# Altium PCB logi-cam.PcbDoc
Units mil, origin at the board's own origin, x right, y up, seen from the top; angles counter-clockwise.
Board outline 1730 x 1379 mil, 2 copper layers (Top Layer, Bottom Layer); 25 components, 25 nets, 102 pads, 55 vias.
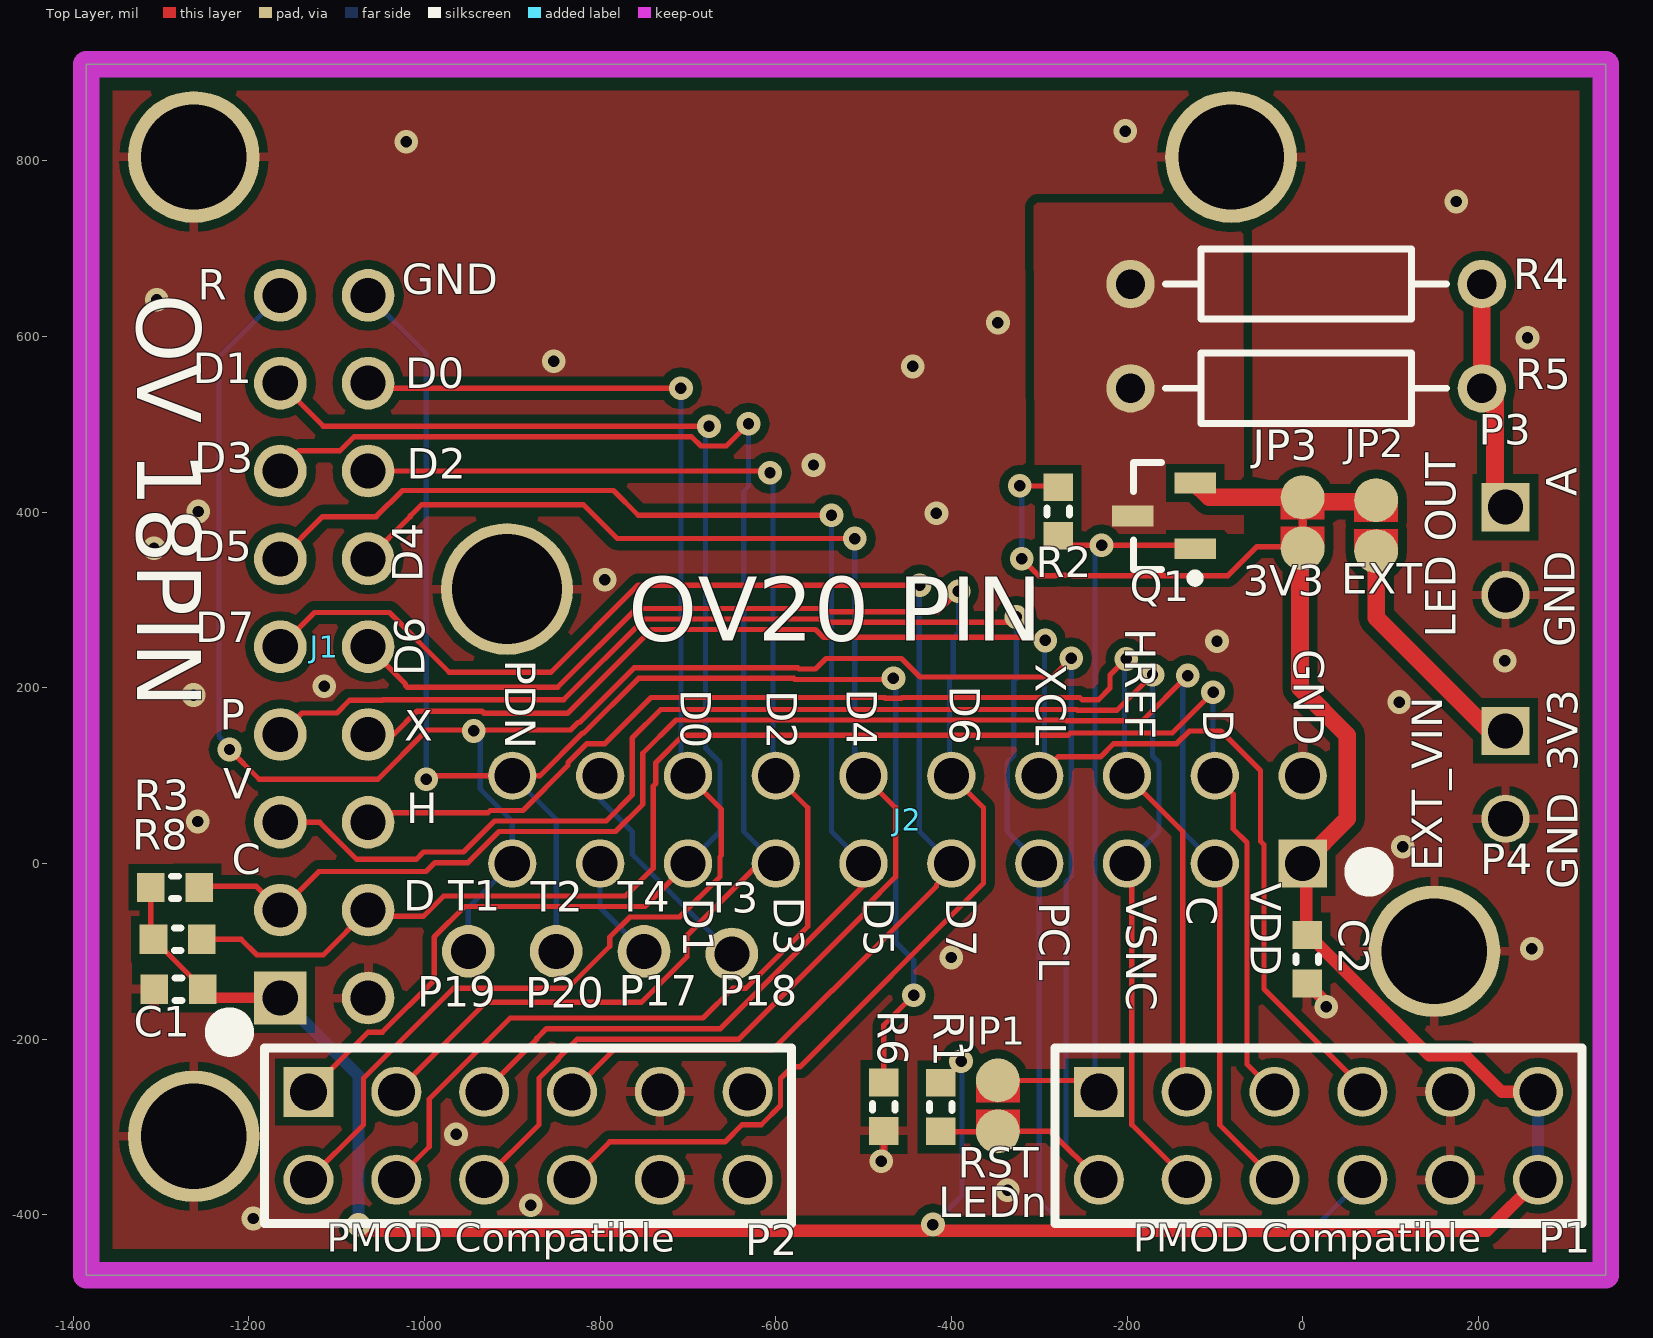
[diagram p0: Top Layer view]
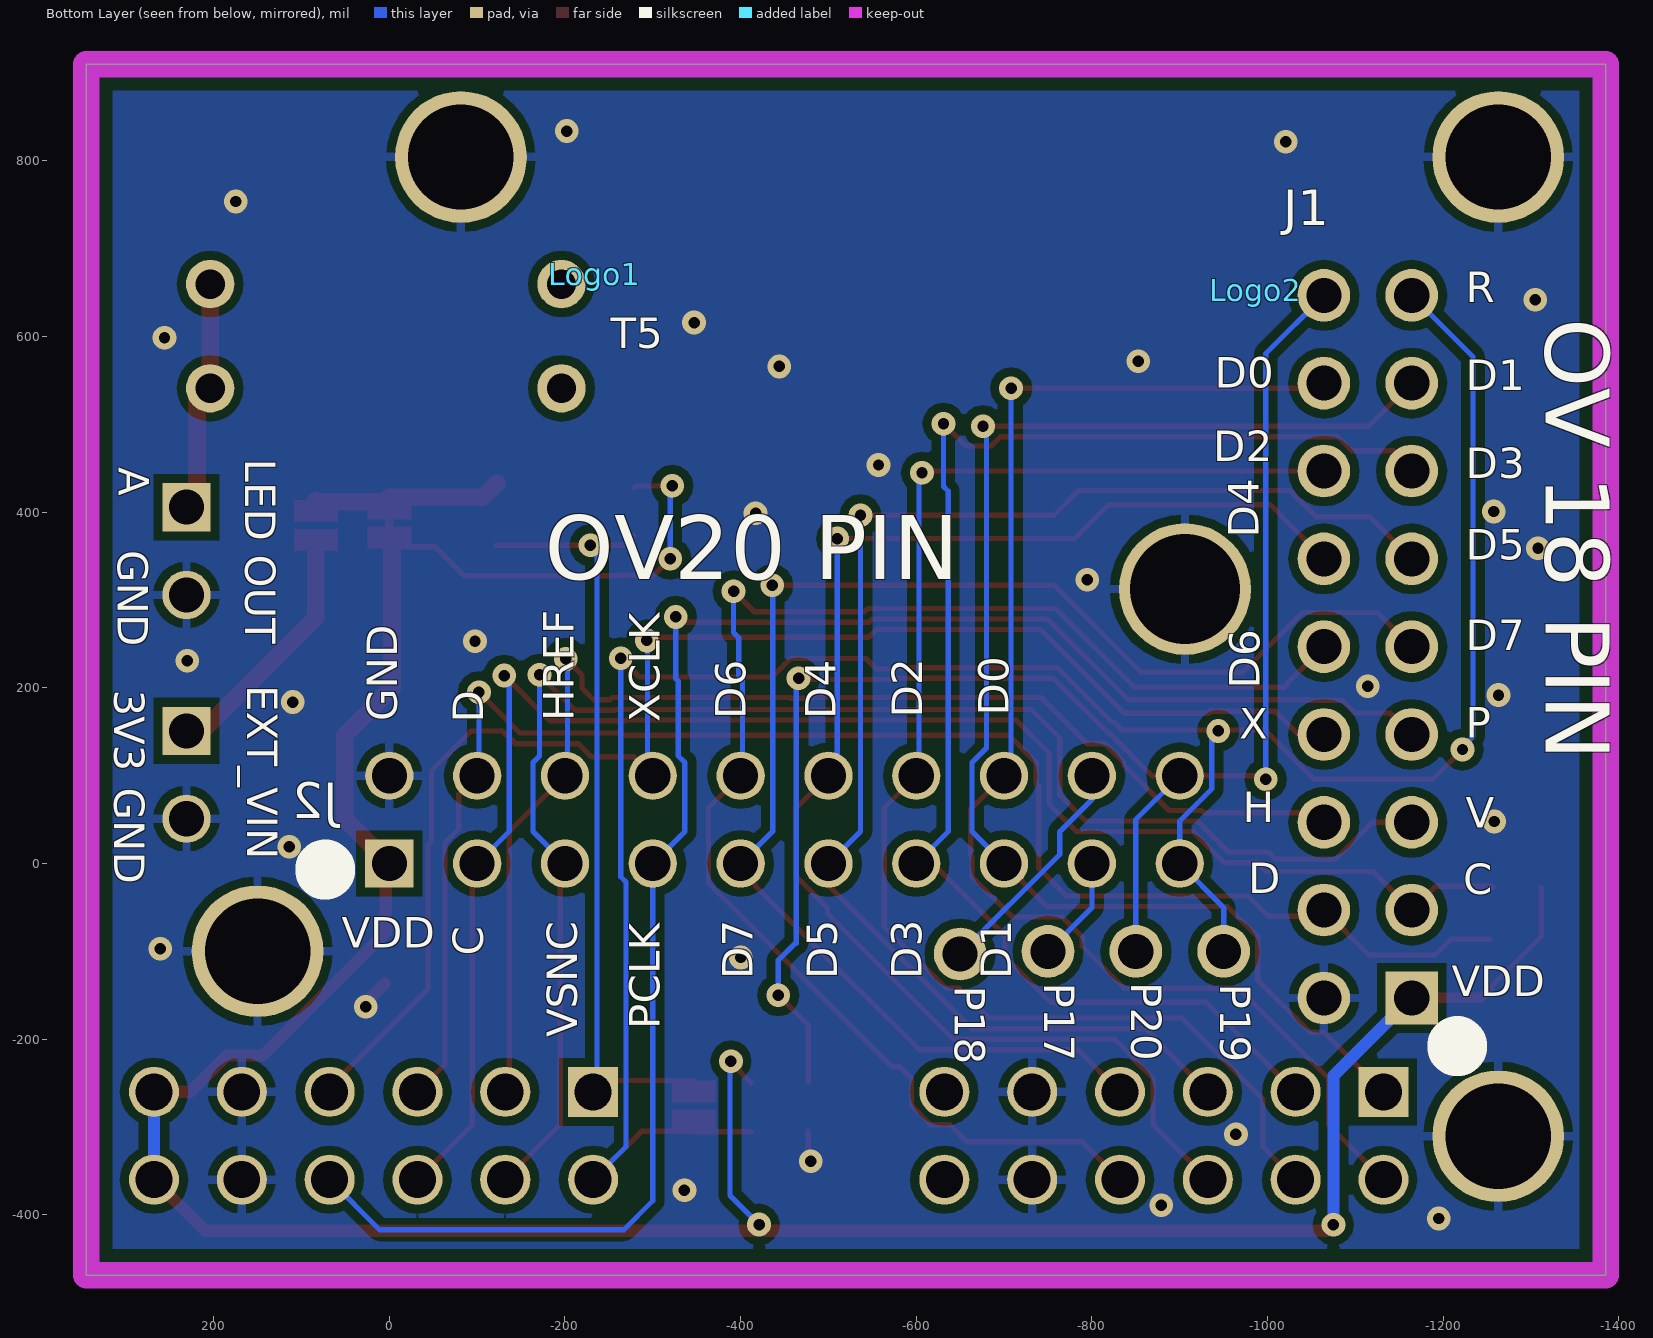
[diagram p1: Bottom Layer view, seen from below]
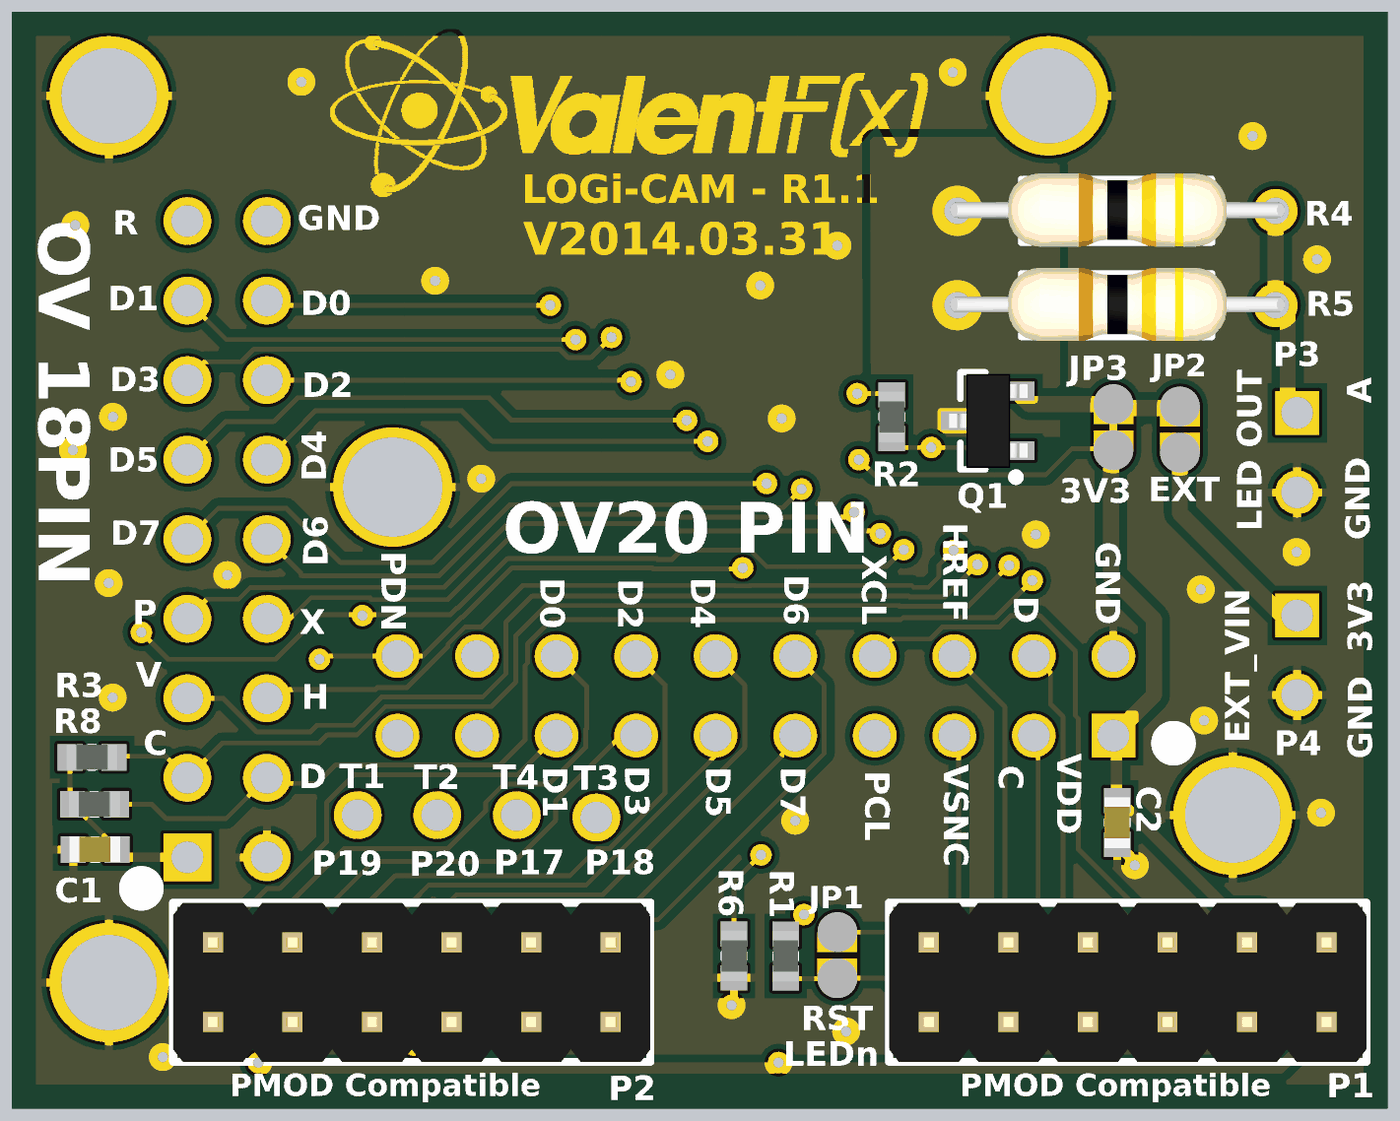
[diagram p2: 3D render of the assembled board from above, using the file's embedded part models]

## Layer stack, top to bottom
Top Solder: solder mask 0.4, Solder Resist, Dk 3.5
Top Layer: signal copper 1.4
Dielectric1: core 12.6, FR-4, Dk 4.8
Bottom Layer: signal copper 1.4
Bottom Solder: solder mask 0.4, Solder Resist, Dk 3.5

## Board outline
-1385,-469 345,-469 345,910 -1385,910

## Design rules (kind name [scope] priority, off if disabled: settings)
Clearance Keepout [onlayer('keep-out layer')] p1: gap=15
Clearance POLY_IN_BGA [(WithinRoom('BGA_INNER'))] p2: gap=6
Clearance POLY_TO_POLY [inpoly] p3: gap=10
Clearance [All] p4: gap=6
FabricationTestPointUsage TestPointUsage [All] p1: valid=0 allowmultiple=FALSE
FabricationTestpoint Testpoint [All] p1: side=3 testpointundercomponent=TRUE minsize=40 maxsize=100 preferedsize=60 minholesize=0 maxholesize=40 preferedholesize=32 testpointgrid=1 allowsidetop=TRUE allowsidebottom=TRUE usegrid=TRUE gridtolerance=0.01
PlaneClearance [All] p1: clearance=10
PolygonConnect POLY_Q [(ObjectKind = 'Poly') And (Name = 'Q_POUR')] p1: connectstyle=Direct reliefconductorwidth=10 reliefentries=4 polygonreliefangle="90 Angle" airgapwidth=10
PolygonConnect "via connect" [isvia] p2: connectstyle=Direct reliefconductorwidth=10 reliefentries=4 polygonreliefangle="90 Angle" airgapwidth=10
PolygonConnect [All] p3: connectstyle=Relief reliefconductorwidth=10 reliefentries=4 polygonreliefangle="90 Angle" airgapwidth=10
RoutingVias [All] p1: holewidth=13 width=27 viastyle="Through Hole" minholewidth=13 minwidth=27 maxholewidth=28 maxwidth=50
SilkToSolderMaskClearance SilkscreenOverComponentPads [IsPad] p1: minsilkscreentomaskgap=10 clearancetoexposedcopper=TRUE
SolderMaskExpansion VIA [isvia and not(locked)] p1: expansion=-100
SolderMaskExpansion SolderMaskExpansion_1 [All] p2: expansion=4
Width [All] p1: maxlimit=20 minlimit=6 preferedwidth=14
25 further rules are at their usual default settings.

## Classes and differential pairs
component class logi-cam-top: Cam1

## Components (designator, comment, footprint, x,y, rotation, side; value= is the part's Value field where it differs from the comment)
C1 ".1uF" C0603 -1280,-143.27 r180 top
C2 ".1uF" C0603 5,-109 r270 top
J1 "OV7670 CAM HEADER" "HEADER_9x2_40_100 1-3-5 THRU DIP" -1164.16,-153.04 r90 top locked
J2 "OV20P Cam Header" "HEADER_10x2_40_100 1-3-5 THRU DIP" 0,0 r180 top locked
JP1 "Solder Jumper" SOLDER_JUMPER -347,-247 r90 top
JP2 "Solder Jumper" SOLDER_JUMPER 83.64,355.83 r270 top
JP3 "Solder Jumper-NC" SOLDER_JUMPER-NC 0,358.83 r270 top net-tie
Logo1 "Valent Logo 750" VALENTFX_750-SolderMask-BOT -234,671 r180 bottom
Logo2 "Valent Logo 750" VALENTFX_750-SOLDERMASK-BOT -986.7,652.83 r180 bottom
P1 "2X6 .1\" HEADER MALE" "PMOD HEADER - Male Vertical" -232,-260 r180 top
P2 "2X6 .1\" HEADER MALE" "PMOD HEADER - Male Vertical" -1132,-260 r180 top
P3 "Header2" "HEADER_2_40_100 THRU SIP" 231,405.83 r270 top
P4 "Header2" "HEADER_2_40_100 THRU SIP" 231,151 r270 top
Q1 "Si2347DS-T1-GE3" sot-23 -158,395.83 r180 top
R1 "10k" R0603 -412,-277.17 r90 top
R2 "10k" R0603 -278.5,400.83 r90 top
R3 "10k" R0603 -1284,-27.27 r0 top
R4 "Res2" AXIAL-0.4 4,659.83 r0 top
R5 "10 Ohm 1/4W" AXIAL-0.4 4,541.16 r0 top
R6 "10k" R0603 -477,-277 r270 top
R8 "10k" R0603 -1281,-86.27 r0 top
T1 "Test Point" "Tp 35-50" -950,-100 r0 top
T2 "Test Point" "Tp 35-50" -850,-100 r0 top
T3 "Test Point" "Tp 35-50" -650,-102.97 r0 top
T4 "Test Point" "Tp 35-50" -750,-100 r0 top

## Footprints (in the part's own frame and the unit in brackets; to place one, negate y for a bottom-side part, rotate by r counter-clockwise, add the part's x,y. Pads: shape width x height; smd on the part's side, far side on the other; paste and mask are expansions set on the pad)
AXIAL-0.4 [mm] "Axial Device, Thru-Hole; 2 Leads; 0.4 in Pin Spacing"
  round 1.4 hole 0.85: 1(-5.08,0) 2(5.08,0)
  silkscreen extent -4.06,-1.02 4.06,1.02, body extent -5.32,-1.14 5.37,1.19, height 2.44
C0603 [mm] "0603 Generic"
  rect 0.8x0.85 smd: 1(-0.7,0) 2(0.7,0)
  silkscreen extent -0.1,-0.33 0.1,0.33, body extent -0.8,-0.42 0.82,0.4, height 0.46
"HEADER_2_40_100 THRU SIP" [mil]
  rect 55x55 hole 40: 1(0,0)
  round 55 hole 40: 2(100,0)
"HEADER_9x2_40_100 1-3-5 THRU DIP" [mil]
  rect 60x60 hole 40: 1(0,0)
  round 60 hole 40: 2(0,-100) 3(100,0) 4(100,-100) 5(200,0) 6(200,-100) 7(300,0) 8(300,-100) 9(400,0) 10(400,-100) 11(500,0) 12(500,-100) 13(600,0) 14(600,-100) 15(700,0) 16(700,-100) 17(800,0) 18(800,-100)
"HEADER_10x2_40_100 1-3-5 THRU DIP" [mil]
  rect 55x55 hole 40: 1(0,0)
  round 55 hole 40: 2(0,-100) 3(100,0) 4(100,-100) 5(200,0) 6(200,-100) 7(300,0) 8(300,-100) 9(400,0) 10(400,-100) 11(500,0) 12(500,-100) 13(600,0) 14(600,-100) 15(700,0) 16(700,-100) 17(800,0) 18(800,-100) 19(900,0) 20(900,-100)
"PMOD HEADER - Male Vertical" [mil] "68021-212HLF"
  rect 57x57 hole 42: 1(0,0)
  round 57 hole 42: 2(-100,0) 3(-200,0) 4(-300,0) 5(-400,0) 6(-500,0) 7(0,100) 8(-100,100) 9(-200,100) 10(-300,100) 11(-400,100) 12(-500,100)
  body extent -550,-50 50,150, height 335
R0603 [mm] "0603 Generic"
  rect 0.8x0.85 smd: 1(-0.7,0) 2(0.7,0)
  silkscreen extent -0.1,-0.33 0.1,0.33, body extent -0.81,-0.41 0.81,0.41, height 0.46
SOLDER_JUMPER [mil]
  round 50 smd: 1(0,0) 2(-58,0)
  Top Layer region: -32.91,25.01 -57.91,25.01 -57.91,-24.99 -32.91,-24.99
  Top Layer region: 0.09,25.01 -24.91,25.01 -24.91,-24.99 0.09,-24.99
SOLDER_JUMPER-NC [mil]
  round 50 smd: 1(0,0) 2(-58,0)
  Top Layer region: -32.91,25 -57.91,25 -57.91,-25 -32.91,-25
  Top Layer region: 0.09,25 -24.91,25 -24.91,-25 0.09,-25
  Top Layer lines w10: 0,0 -50,0
sot-23 [mm] "SOT-23"
  rect 1.2x0.6 smd: 1(-0.9,0.95) 2(-0.9,-0.95) 3(0.9,0)
  silkscreen extent -1.03,-1.55 0.87,1.92, body extent -1.27,-1.5 1.23,1.5, height 1.07
"Tp 35-50" [mil]
  round 60 hole 40: 1(0,0)
VALENTFX_750-SolderMask-BOT [mil]
VALENTFX_750-SOLDERMASK-BOT [mil]

## Part data
C1 C2: library part "C0603 - C1608X7R1E104MT", ".10uF X7R 20% (MLCC) - SMD/SMT 0603 25volts"
J1: library part "CAM - OV7670", "CONN HEADER FMAL 18PS .1\" DL GOLD"
J2: library part "CAM - 0V20P", "CONN HEADR FMALE 20 POS .1\" DL AU"
JP1 JP2 JP3: "Solder/Configuration Jumper"
P1 P2: library part "P-MOD - PRPC006DAAN-RC", "CONN HEADER .100\" DUAL STR 12 POS"
P3 P4: "Header 2 pin"
Q1: library part "PMOS - Si2347DS-T1-GE3", "MOSFET -30V .042Ohm@10V 5A P-Ch G-III"
R1 R2 R3 R6 R8: library part "R0603 - CRCW060310K0FKEA", "10k Thick Film Resistors - SMD 1/10watt 10Kohms 1%"
R4: "1/4W .4 Axial"
R5: library part "AX_25 - MF1/4DCT52R10R0F2", "Metal Film Resistors - Through Hole 10ohms 1% 100PPM"
T1 T2 T3 T4: library part "Test Point 2", "Test Point Smaller Symbol"

## Free pads (board coordinates)
  round 150 hole 120: MT(-1262.58,-310.52) MT(-1262.58,804.44) MT(-81.48,804.44) MT(150,-100)
  round 150 hole 125: MT(-906,312.5)

## Via types
v1: diameter 27, hole 13, Top Layer to Bottom Layer, 55 vias

## Nets (pads, with @x,y where several pads share a name; then routed paths per layer and width w, separated by ;. In a path a pad name is that pad's centre, name@x,y a point inside that pad or via, vN(x,y) a via of type N, cw(c..) or ccw(c..) an arc to the next point about the centre after c; other vN are vias at no path point)
3V3: C1.1 C2.1 J1.1 J2.1 JP3.1 P1.6 P1.12 R1.2 R2.2 R3.1 R8.1 | length 3493.5
  Top Layer w6: R3.1 -1311.56,-83.27 R8.1 -1252.44,-142.39 C1.1 ; R1.2 -389,-226.61 v1(-389,-225) ; v1(-322.01,430) -280.11,430 R2.2 ; v1(-320,346.96) -300.87,327.83 -281.82,327.83 -281.32,328.33 -262.68,328.33 -262.18,327.83 -85.13,327.83 -52.13,360.83 -3,360.83 -2,360.83 JP3.1
  Top Layer w12: C1.1 -1242.67,-153.04 J1.1
  Top Layer w14: v1(-1075,-411.17) -1068.17,-418 v1@-427.83,-418 ; v1@-414.17,-418 210,-418 P1.12 ; J2.1@4,-21 4,-78.45 144.05,-218.5 185.19,-218.5 226.69,-260 P1.6
  Top Layer w20: JP3.1@-3,360.83 -3,200 51,146 51,51 J2.1
  Bottom Layer w6: v1@-421,-412 v1(-421,-411.17) v1(-421,-411) -388,-378 -388,-224 v1(-389,-225) ; v1(-322.01,430) -320,427.99 v1(-320,346.96)
  Bottom Layer w14: J1.1 -1163.58,-153.04 -1075,-241.62 v1(-1075,-411.17) ; P1.12 P1.6
CTL_CLK: J1.3 J2.3 P1.9 R3.2 | length 1902.2
  Top Layer w6: R3.2 -1255.17,-26 -1191.2,-26 J1.3 -1120.29,-9.17 -998.17,-9.17 -988,1 -950.62,1 -915.12,36.5 -782.33,36.5 -751.5,67.33 -751.5,125.5 -713.5,163.5 -270,163.5 -269,162.5 -182.5,162.5 v1(-131,214) ; J2.3 -94.5,-5.5 -94.5,-297.5 P1.9
  Bottom Layer w6: v1(-131,214) -136.5,208.5 -136.5,36.5 J2.3
CTL_DATA: J1.4 J2.4 P1.3 R8.2 | length 1841.3
  Top Layer w6: R8.2 -1208.77,-86.27 -1190.87,-104.17 -1115.29,-104.17 J1.4 -1057.2,-60 -1001,-60 -978,-37 -771.2,-37 -739.5,-5.3 -739.5,88.25 -736.5,91.25 -736.5,115.12 -705.62,146 -267,146 -264.5,148.5 -148.5,148.5 v1(-102,195) ; J2.4 -79,79 -79,39.4 -63.5,23.9 -63.5,-228.5 P1.3
  Bottom Layer w6: v1(-102,195) -102,102 J2.4
D0: J1.16 J2.16 P2.7 | length 1583
  Top Layer w6: P2.7 -1069.5,-297.5 -1069.5,-244.47 -967.03,-142 -836.85,-142 -789,-94.15 -789,-83.85 -766.15,-61 -709.38,-61 -663.5,-15.12 -663.5,7.5 -662,9 -662,62 J2.16 ; J1.16 -1058.35,541.16 v1(-708,541.16)
  Bottom Layer w6: v1(-708,541.16) -708,108 J2.16
D1: J1.15 J2.15 P2.1 | length 1598.5
  Top Layer w6: J1.15 -1115.16,497.96 v1(-676,497.96) ; P2.1 -1064.04,-192.04 -1048,-192.04 -989,-133.04 -989,-83.85 -954.15,-49 -749,-49 J2.15
  Bottom Layer w6: J2.15 -663.5,36.5 -663.5,115.12 -680,131.62 -680,493.96 v1(-676,497.96)
D2: J1.14 J2.14 P2.8 | length 1612.7
  Top Layer w6: J1.14 -608.46,446.96 v1(-606.5,445) ; P2.8 -994.5,-322.5 -994.5,-268.13 -902.37,-176 -683,-176 -648.97,-141.97 -633.85,-141.97 -563.5,-71.62 -563.5,63.5 J2.14
  Bottom Layer w6: v1(-606.5,445) -603,441.5 -603,103 J2.14
D3: J1.13 J2.13 P2.2 | length 1605.6
  Top Layer w6: -1143,470 -1096.27,470 -1080.31,485.96 -695.82,485.96 -685.32,475.46 -656.37,475.46 v1(-631,500.83) ; P2.2 -930,-158 -752.85,-158 -701,-106.15 -701,-81.85 -619.15,0 J2.13
  Bottom Layer w6: v1(-631,500.83) -631,429.33 -636.5,423.83 -636.5,36.5 J2.13
D4: J1.12 J2.12 P2.9 | length 1647.2
  Top Layer w6: J1.12 -1016.12,395 -1016.12,395.88 -1003.5,408.5 -819.03,408.5 -780.53,370 v1(-510,370) ; P2.9 -869.5,-297.5 -869.5,-244.47 -847.53,-222.5 -847.53,-221.53 -826,-200 -642,-200 -499,-57 -499,-50.62 -463.5,-15.12 -463.5,63.5 J2.12
  Bottom Layer w6: v1(-510,370) -510,110 J2.12
D5: J1.11 J2.11 P2.3 | length 1638.2
  Top Layer w6: J1.11 -1116.12,395 -1055,395 -1025.17,424.83 -784.86,424.83 -756.53,396.5 v1(-536.5,396.5) ; P2.3 -872,-200 -872,-199 -861,-188 -662.9,-188 -500,-25.1 J2.11
  Bottom Layer w6: v1(-536.5,396.5) -536.5,36.5 J2.11
D6: J1.10 J2.10 P2.10 | length 1719.7
  Top Layer w6: J1.10 -1021.7,204.5 -1021.7,202.51 -1020.01,200.83 -848.17,200.83 -758.5,290.5 -544.74,290.5 -541.07,286.83 -415.17,286.83 v1(-392,310) ; P2.10 -788.97,-316.97 -657.97,-316.97 -638.5,-297.5 -616.47,-297.5 -594.5,-275.53 -594.5,-244.68 -581.32,-231.5 -572.5,-231.5 -363.5,-22.5 -363.5,63.5 J2.10
  Bottom Layer w6: J2.10 -402.03,102.03 -402.03,210 -398,214.03 -398,257 -392,263 v1(-392,310)
D7: J1.9 J2.9 P2.4 | length 1659.8
  Top Layer w6: J1.9 -1125.16,285.96 -1039.93,285.96 -971.8,217.83 -856.06,217.83 -756.88,317 v1(-436,317) ; P2.4 -784,-212 -603.5,-212 -536.5,-145 -536.14,-145 -417,-25.86 -417,-24
  Bottom Layer w6: v1(-436,317) -436.5,316.5 -436.5,36.5 J2.9
EXT_PWR: JP2.1 P4.1 | length 276.7
  Top Layer w20: JP2.1 83.64,279.86 212.5,151 P4.1
GND: C1.2 C2.2 J1.2 J2.2 P1.5 P1.11 P2.5 P2.11 P3.2 P4.2 pad.MT R6.2 | length 71.2
  Top Layer w6: v1(-480,-339) -477,-336 R6.2
  Top Layer w14: C2.2 27,-158.56 v1(27,-163)
  other v1: -1195,-404.17 -879,-389.17 -336,-372 -964,-308.17 -400,-107 261,-97 114,19 -1258,47.83 109.91,183.83 -1263,191.83 -1114,201.83 230.24,230.83 -97.54,253 -794.7,323 -1308,359 -417,398.83 -1257.58,400.83 -557,453.83 -444,566 -852.66,571.89 256,598.83 -347,616 -1305,641.96 175,753.83 -1020.81,822 -202,834
HREF: J1.6 J2.6 P1.2 | length 1476.7
  Top Layer w6: J1.6 -1053.29,57.83 -927.73,57.83 -925.06,60.5 -887.88,60.5 -836.5,111.88 -836.5,115.12 -815.12,136.5 -794.53,136.5 -742.03,189 -475.99,189 -475.32,188.33 -456.68,188.33 -456.01,189 -253.82,189 -251.32,186.5 -232.68,186.5 -219.5,199.68 -219.5,214.5 v1(-201,233) ; J2.6 -136.5,36.5 -136.5,-255.5 P1.2
  Bottom Layer w6: v1(-201,233) -203,231 -203,103 J2.6
LED_DRIVE: JP1.1 P1.1 Q1.1 R2.1 | length 909
  Top Layer w6: JP1.1 -245,-247 P1.1 ; R2.1 -267.56,362.32 v1(-229,362.32) Q1.1@-121.69,362.32
  Bottom Layer w6: P1.1 -236.5,-255.5 -236.5,354.82 v1(-229,362.32)
NetJ2_17: J2.17 T4.1 | length 120.7
  Bottom Layer w6: J2.17 -800,-50 T4.1
NetJ2_18: J2.18 T3.1 | length 265.1
  Bottom Layer w6: J2.18 -800,73 -763.5,36.5 -763.5,10.53 T3.1
NetJP2_2: JP2.2 JP3.2 Q1.2 | length 230.7
  Top Layer w20: Q1.2 -106.17,416.83 JP3.2 ; JP3.2@-16,409.83 -14,411.83 81.64,411.83 JP2.2
NetP3_1: P3.1 R4.2 R5.2 | length 265.2
  Top Layer w20: R4.2 R5.2 219,526.16 219,417.83 P3.1
NetQ1_3: Q1.3 R4.1 R5.1
PCLK: J1.7 J2.7 P1.10 | length 1986.2
  Top Layer w6: J1.7 -1139.62,171.5 -1099.68,171.5 -1085.22,185.96 -1048,185.96 -1047.46,186.5 -841.5,186.5 -749.5,278.5 -549.71,278.5 -546.04,274.83 -332,274.83 v1(-326,280.83)
  Bottom Layer w6: v1(-326,280.83) -326,210.83 -329,207.83 -329,122.62 -336.5,115.12 -336.5,36.5 J2.7 -300,-384 -267,-417 11,-417 P1.10
PWDN: J1.18 J2.20 R6.1 T2.1 | length 1863
  Top Layer w6: v1(-998,96) -994,100 J2.20 -868.59,100 -820.09,148.5 -818.56,148.5 -756.23,210.83 -579.62,210.83 -578.29,209.5 -467.33,209.5 v1(-466,210.83) ; R6.1 -477,-184 v1(-443,-150)
  Bottom Layer w6: J1.18 -998,580.8 v1(-998,96) ; J2.20 -850,50 T2.1 ; v1(-466,210.83) -463.5,208.33 -463.5,-91 ; -462,-91 -443,-110 v1(-443,-150)
RST#_FSIN: J1.17 J2.19 JP1.2 P1.7 R1.1 T1.1 | length 2705.1
  Top Layer w6: v1(-1222,129.83) -1188.13,95.96 -1053,95.96 -996.96,152 -833.56,152 -825.06,160.5 -823.53,160.5 -761.2,222.83 -574.65,222.83 -573.32,221.5 -554.68,221.5 -542.85,233.33 -456.68,233.33 -435.85,212.5 -284.83,212.5 v1(-263.5,233.83) ; R1.1@-412,-305.56 -347.56,-305.56 JP1.2 -287,-305 P1.7
  Bottom Layer w6: v1@-1219,129.83 -1234,144.83 -1234,577.12 J1.17 ; T1.1 -950,-50 J2.19 -900,48.38 -936.5,84.88 -936.5,143.5 v1(-944,151) ; v1(-263.5,233.83) -263.5,-15.12 -269.5,-21.12 -269.5,-322.5 P1.7
VSYNC: J1.5 J2.5 P1.8 | length 1757.9
  Top Layer w6: J1.5 -1119.31,46.96 -1077.18,4.83 -1009.17,4.83 -1001,13 -955.59,13 -920.09,48.5 -793,48.5 -763.5,78 -763.5,142.88 -730.88,175.5 -257.29,175.5 -256.29,174.5 -211.5,174.5 v1(-171,215) ; J2.5 -194.5,-5.5 -194.5,-297.5 P1.8
  Bottom Layer w6: J2.5 -163.5,36.5 -163.5,115.12 -171,122.62 v1(-171,215)
XCLK: J1.8 J2.8 P1.4 | length 1690.6
  Top Layer w6: J1.8 -1035.04,146.96 -1008.5,173.5 -934.68,173.5 -932.18,171 -837,171 -741.5,266.5 -554.68,266.5 -545.68,257.5 -296.5,257.5 v1(-293,254) ; J2.8 -278.5,121.5 -230.12,121.5 -215.12,136.5 -143.53,136.5 -129.03,151 -93,151 -48,106 -48,25.37 -44,21.37 -44,-143 68,-255 P1.4
  Bottom Layer w6: J2.8 -294,106 -294,253 v1(-293,254)
pads on no net: P2.6 P2.12

## Polygon pours and split planes (outlines as drawn)
GND on Top Layer "GND_TOP" (solid, remove dead copper, pour order 5): -1368,-453 -1368,918 347.95,918 347.95,-453
NetQ1_3 on Top Layer "Q_POUR" (solid, remove dead copper, pour order 4): -305.17,374.32 -304.82,374.32 -306,752.51 -73.11,752.51 -72.02,755 -67.4,744.52 -67,375.69 -305.62,371.45 -305.17,371.04 -305.59,374.32 -305.17,371.45
GND on Bottom Layer "GND_BOT" (solid, pour order 6): -1366,-455 -1366,900 325,900 325,-455

## Keep-outs
Keep-Out Layer:
  the board outline again, w30

## Silkscreen, mask and mechanical layers (free items; w line width, h text height)
Top Overlay:
  circle w40: c-1222,-192 r8.06
  circle w40: c75.57,-9.52 r8.06
  lines w10: -1182,-410 -1082,-410 -582,-410 -582,-210 -1182,-210 -1182,-410 ; -282,-410 -282,-210 318,-210 318,-410 -282,-410
  text "OV 18PIN" at -1351,649 h125 r270
  text "GND" at -1025.85,636 h60
  text "R" at -1258,630 h60
  text "D1" at -1264,535 h60
  text "D0" at -1022,529 h60
  text "D3" at -1262,433 h60
  text "D2" at -1020,426 h60
  text "A" at 324,418 h60 r90
  text "D5" at -1264,332 h60
  text "D4" at -990,320 h60 r90
  text "EXT" at 44,295 h60
  text "3V3" at -68,293 h60
  text "HREF" at -214,267.83 h60 r270
  text "LED OUT" at 186,257 h60 r90
  text "GND" at 322,246 h60 r90
  text "GND" at -22,243.83 h60 r270
  text "D7" at -1261,240 h60
  text "PDN" at -920.09,231.83 h60 r270
  text "OV20 PIN" at -768,230 h125
  text "XCL" at -316.09,227.5 h60 r270
  text "D6" at -988,213 h60 r90
  text "D6" at -414,202.39 h60 r270
  text "D4" at -531,199 h60 r270
  text "D0" at -720.34,198.39 h60 r270
  text "D2" at -622.34,197.39 h60 r270
  text "D" at -125,175.5 h60 r270
  text "P" at -1233,140.35 h60
  text "X" at -1023,128 h60
  text "3V3" at 325,104.83 h60 r90
  text "V" at -1229,61.83 h60
  text "H" at -1021,34 h60
  text "EXT_VIN" at 171,-9 h60 r90
  text "VDD" at -71,-22.17 h60 r270
  text "C" at -1219.59,-24.17 h60
  text "GND" at 325,-29.17 h60 r90
  text "VSNC" at -213,-36 h60 r270
  text "C" at -144,-37.17 h60 r270
  text "D3" at -614,-38 h60 r270
  text "D1" at -717,-39 h60 r270
  text "D5" at -512,-39 h60 r270
  text "D7" at -418,-39 h60 r270
  text "PCL" at -312,-44 h60 r270
  text "D" at -1024,-66 h60
  text "P17" at -779,-174 h60
  text "P18" at -665,-174 h60
  text "P19" at -1008,-175 h60
  text "P20" at -885,-176 h60
  text "RST" at -393,-370 h60
  text "LEDn" at -415,-415 h60
  text "PMOD Compatible" at -1111,-453 h55
  text "PMOD Compatible" at -193,-453 h55
Bottom Overlay:
  circle w60: c-1216,-208 r4.12
  circle w60: c73,-7 r4.12
  text "R" at -1225.89,627 h60
  text "OV 18 PIN" at -1293,621 h125 r90
  text "T5" at -252,575 h60
  text "D0" at -940,530 h60
  text "D1" at -1225.89,527 h60
  text "LED OUT" at 176,461 h60 r90
  text "A" at 320,451 h60 r90
  text "D2" at -938.4,446 h60
  text "D3" at -1225.89,427 h60
  text "D4" at -1002,371 h60 r270
  text "GND" at 321,357 h60 r90
  text "D5" at -1225.89,334 h60
  text "OV20 PIN" at -177,300 h125
  text "D7" at -1225.89,231 h60
  text "EXT_VIN" at 174,203 h60 r90
  text "D6" at -1003,199 h60 r270
  text "3V3" at 325,197.83 h60 r90
  text "D0" at -717,168.03 h60 r270
  text "D2" at -619,166.03 h60 r270
  text "D4" at -520,164.03 h60 r270
  text "D6" at -418,164.03 h60 r270
  text "HREF" at -222,162.03 h60 r270
  text "GND" at -21,162.03 h60 r270
  text "XCLK" at -320,161.03 h60 r270
  text "D" at -119,160.26 h60 r270
  text "P" at -1225.89,131 h60
  text "X" at -967.92,130 h60
  text "GND" at 325,86.55 h60 r90
  text "H" at -971.97,35 h60
  text "V" at -1225.89,29 h60
  text "D" at -978,-46 h60
  text "C" at -1223,-47 h60
  text "C" at -119,-105 h60 r270
  text "VDD" at 54,-108 h60
  text "D1" at -720,-132 h60 r270
  text "D3" at -618,-132 h60 r270
  text "D5" at -522,-132 h60 r270
  text "D7" at -426,-132 h60 r270
  text "P20" at -833,-135 h60 r90
  text "P17" at -734,-136 h60 r90
  text "P19" at -934,-137 h60 r90
  text "P18" at -632,-139 h60 r90
  text "VDD" at -1210,-163 h60
  text "PCLK" at -320,-189 h60 r270
  text "VSNC" at -225.99,-198.01 h60 r270
Top Solder:
  text "LOGi-CAM - R1.1" at -744,670 h70
  text "V2014.03.31" at -742,605 h80
Bottom Solder:
  text "LOGi-CAM- R1.1" at -468,644 h60
  text "V2014.03.31" at -469,574 h80
Mechanical 2:
  lines w10: -1533.13,-408.89 -1514,-469.17 ; -1524,-469.03 -1504,-469.32 ; -1514.87,850.3 -1494,910 ; -1509.6,-165.43 -1514,-469.17 ; -1504,910.15 -1484,909.85 ; -1498.4,606.25 -1494,910 ; -1493.13,-409.47 -1514,-469.17 ; -1474.87,849.72 -1494,910 ; -1373.15,-558.18 -1373.02,-538.18 ; -1313.22,-568.57 -1373.09,-548.18 ; -1312.96,-528.57 -1373.09,-548.18 ; -901.92,-551.22 -1373.09,-548.18 ; -140.17,-556.14 331,-559.17 ; 270.87,-578.79 331,-559.17 ; 271.13,-538.79 331,-559.17 ; 330.94,-569.17 331.06,-549.17
  text "1379.319 (mil)" at -1473.46,-155.95 h60 r89.17
  text "1704.121 (mil)" at -892.15,-587.28 h60 r359.63
Mechanical 3:
  lines w20: -4028.96,192.83 -1628.96,192.83 ; -4028.96,2292.83 4921.04,2292.83
  text "PCB Fabrication Notes" at -4008.96,2412.83 h150
  text "Unless otherwise specified, all dimensions are in inches" at -4040,2092.83 h100
  text "Overall Dimension:  1.7\"  x  1.4\"" at -4040,1992.83 h100
  text "Finished Thickness:  .062\"" at -4040,1892.83 h100
  text "Layer Count: 2" at -4040,1792.83 h100
  text "Min Thru Hole: 13 mil" at -4040,1703.83 h100
  text "Annular Ring: 7 mil" at -4040,1610.83 h100
  text "Min Trace/Space: 6 mil" at -4040,1515.83 h100
  text "Drill Count:" at -4040,1409.83 h100
  text ".hole_Count" at -3444.96,1409.83 h100
  text "PAD Count:" at -4040,1309.83 h100
  text ".pad_Count" at -3444.96,1309.83 h100
  text "Component Count:" at -4040,1209.83 h100
  text ".Component_Count" at -3244.96,1209.83 h100
  text "Via Count:" at -4040,1109.83 h100
  text ".Via_Count" at -3444.96,1109.83 h100
  text "Plating: Gold ENIG" at -4040,888.56 h100
  text "Solder Mask:  Black" at -4040,788.83 h100
  text "Legend:  White Non-Conductive Ink LPI Process" at -4040,688.83 h100
  text "RS274-X Gerber Format, 2.5 Leading Zeros Suppressed" at -4040,588.83 h100
  text "Excellon Drill Format, 2.5 Trailing Zeros Suppressed" at -4040,488.83 h100
  text "Layer Details" at -4028.96,292.83 h100
  text "4-Layer Stackup" at -3228.96,292.83 h100
  text "POLARITY" at -2328.96,292.83 h100
  text ".GTL - Top Copper" at -4028.96,92.83 h100
  text "POSITIVE" at -2328.96,92.83 h100
  text ".G1 - Inner Copper (Ground)" at -4028.96,-7.17 h100
  text "POSITIVE" at -2328.96,-7.17 h100
  text ".G2 - Inner Copper (VDD)" at -4028.96,-107.17 h100
  text "POSITIVE" at -2328.96,-107.17 h100
  text ".GBL - Bottom Copper" at -4028.96,-207.17 h100
  text "POSITIVE" at -2330,-207.63 h100
  text ".GTO - Top Silkscreen" at -4028.96,-407.17 h100
  text ".GBO - Bottom Silkscreen" at -4028.96,-507.17 h100
  text ".GTP - Top Solder Paste" at -4028.96,-607.17 h100
  text ".GBP - Bottom Solder Paste" at -4028.96,-707.17 h100
  text ".GTS -  Top Solder Mask" at -4028.96,-807.17 h100
  text ".GBS - Bottom Solder Mask" at -4028.96,-907.17 h100
  text ".GKO - Board Outline" at -4028.96,-1007.17 h100
  text ".GM1 - 3D Part Bodies - System" at -4028.96,-1107.17 h100
  text ".GM2 - Board Dimensions" at -4028.96,-1207.17 h100
  text ".GM3 - Single Board Fabrication Notes" at -4028.96,-1307.17 h100
  text ".GM4 - Single Board Score/Tab Route" at -4028.96,-1407.17 h100
  text ".GM13 - 3D Body Alt" at -4028.96,-1507.17 h100
  text ".GM15 - Assembly Outlines - Top" at -4028.96,-1607.17 h100
  text ".GM20 - Panel Dimensions" at -4028.96,-1707.17 h100
  text ".GM21 - Panel Score/Tab Route" at -4028.96,-1807.17 h100
  text ".GM22 - Panel Dimensions" at -4028.96,-1907.17 h100
  text ".TXT/.DRL - NC-Drill" at -4028.96,-2107.17 h100
Mechanical 16:
  lines w5: -6230,-1755 -6030,-1755 ; -6230,1020 -6030,1020 ; -6230,3795 -6030,3795 ; -4290,-4530 -4290,-4330 ; -4290,6370 -4290,6570 ; -2355,-4530 -2355,-4330 ; -2355,6370 -2355,6570 ; -420,-4530 -420,-4330 ; -420,6370 -420,6570 ; 1520,-4530 1520,-4330 ; 1520,6370 1520,6570 ; 3455,-4530 3455,-4330 ; 3455,6370 3455,6570 ; 4570,-4030 9070,-4030 ; 4570,-3730 9070,-3730 ; 5390,-4530 5390,-4330 ; 5390,6370 5390,6570 ; 6070,-4330 6070,-3730 6070,-3430 4570,-3430 4570,-4330 ; 7330,-4530 7330,-4330 ; 7330,6370 7330,6570 ; 8170,-4330 8170,-3730 ; 9070,-3430 3170,-3430 3170,-4330 4570,-4330 ; 9070,-3130 9070,-4330 ; 9070,-1755 9270,-1755 ; 9070,1020 9270,1020 ; 9070,3795 9270,3795 ; 4570,-4330 9070,-4330 ; 9070,-4330 -6030,-4330 -6030,6370 9070,6370 9070,-4330 ; -6230,-4530 -6230,6570 9270,6570 9270,-4530 -6230,-4530
  text "1" at -5283.66,6435 h60
  text "2" at -3353,6435 h60
  text "3" at -1413.66,6435 h60
  text "4" at 527,6435 h60
  text "5" at 2467,6435 h60
  text "6" at 4397,6435 h60
  text "7" at 6347,6435 h60
  text "8" at 8277,6435 h60
  text "A" at -6155,5097 h60
  text "A" at 9145,5097 h60
  text "B" at -6155,2317 h60
  text "B" at 9145,2317 h60
  text "C" at -6155,-463 h60
  text "C" at 9145,-463 h60
  text "D" at -6155,-3223 h60
  text "D" at 9145,-3223 h60
  text "PCB DESIGNER:" at 4620,-3525 h60
  text "TITLE:" at 6170,-3530 h60
  text "Michael Jones" at 4685,-3660 h60
  text "Group VIII Technology" at 3410,-3760 h60
  text "DATE:" at 4620,-3830 h60
  text "PART NO.:" at 6120,-3830 h60
  text "REV:" at 8220,-3830 h60
  text "1652 W 820 N" at 3410,-3860 h60
  text ".PRINT_DATE" at 4670,-3950 h60
  text "Provo, UT 84601" at 3410,-3960 h60
  text "801/379-0118" at 3410,-4060 h60
  text "FILE NAME:" at 4620,-4130 h60
  text "DWG NO:" at 6120,-4130 h60
  text "SCALE:" at 8220,-4130 h60
  text ".PCB_FILE_NAME_NO_PATH" at 4670,-4250 h60
  text "1" at -5283.66,-4465 h60
  text "2" at -3353,-4465 h60
  text "3" at -1413.66,-4465 h60
  text "4" at 527,-4465 h60
  text "5" at 2467,-4465 h60
  text "6" at 4397,-4465 h60
  text "7" at 6347,-4465 h60
  text "8" at 8277,-4465 h60